# Allegro board reflowSolderCtrl_V10.brd
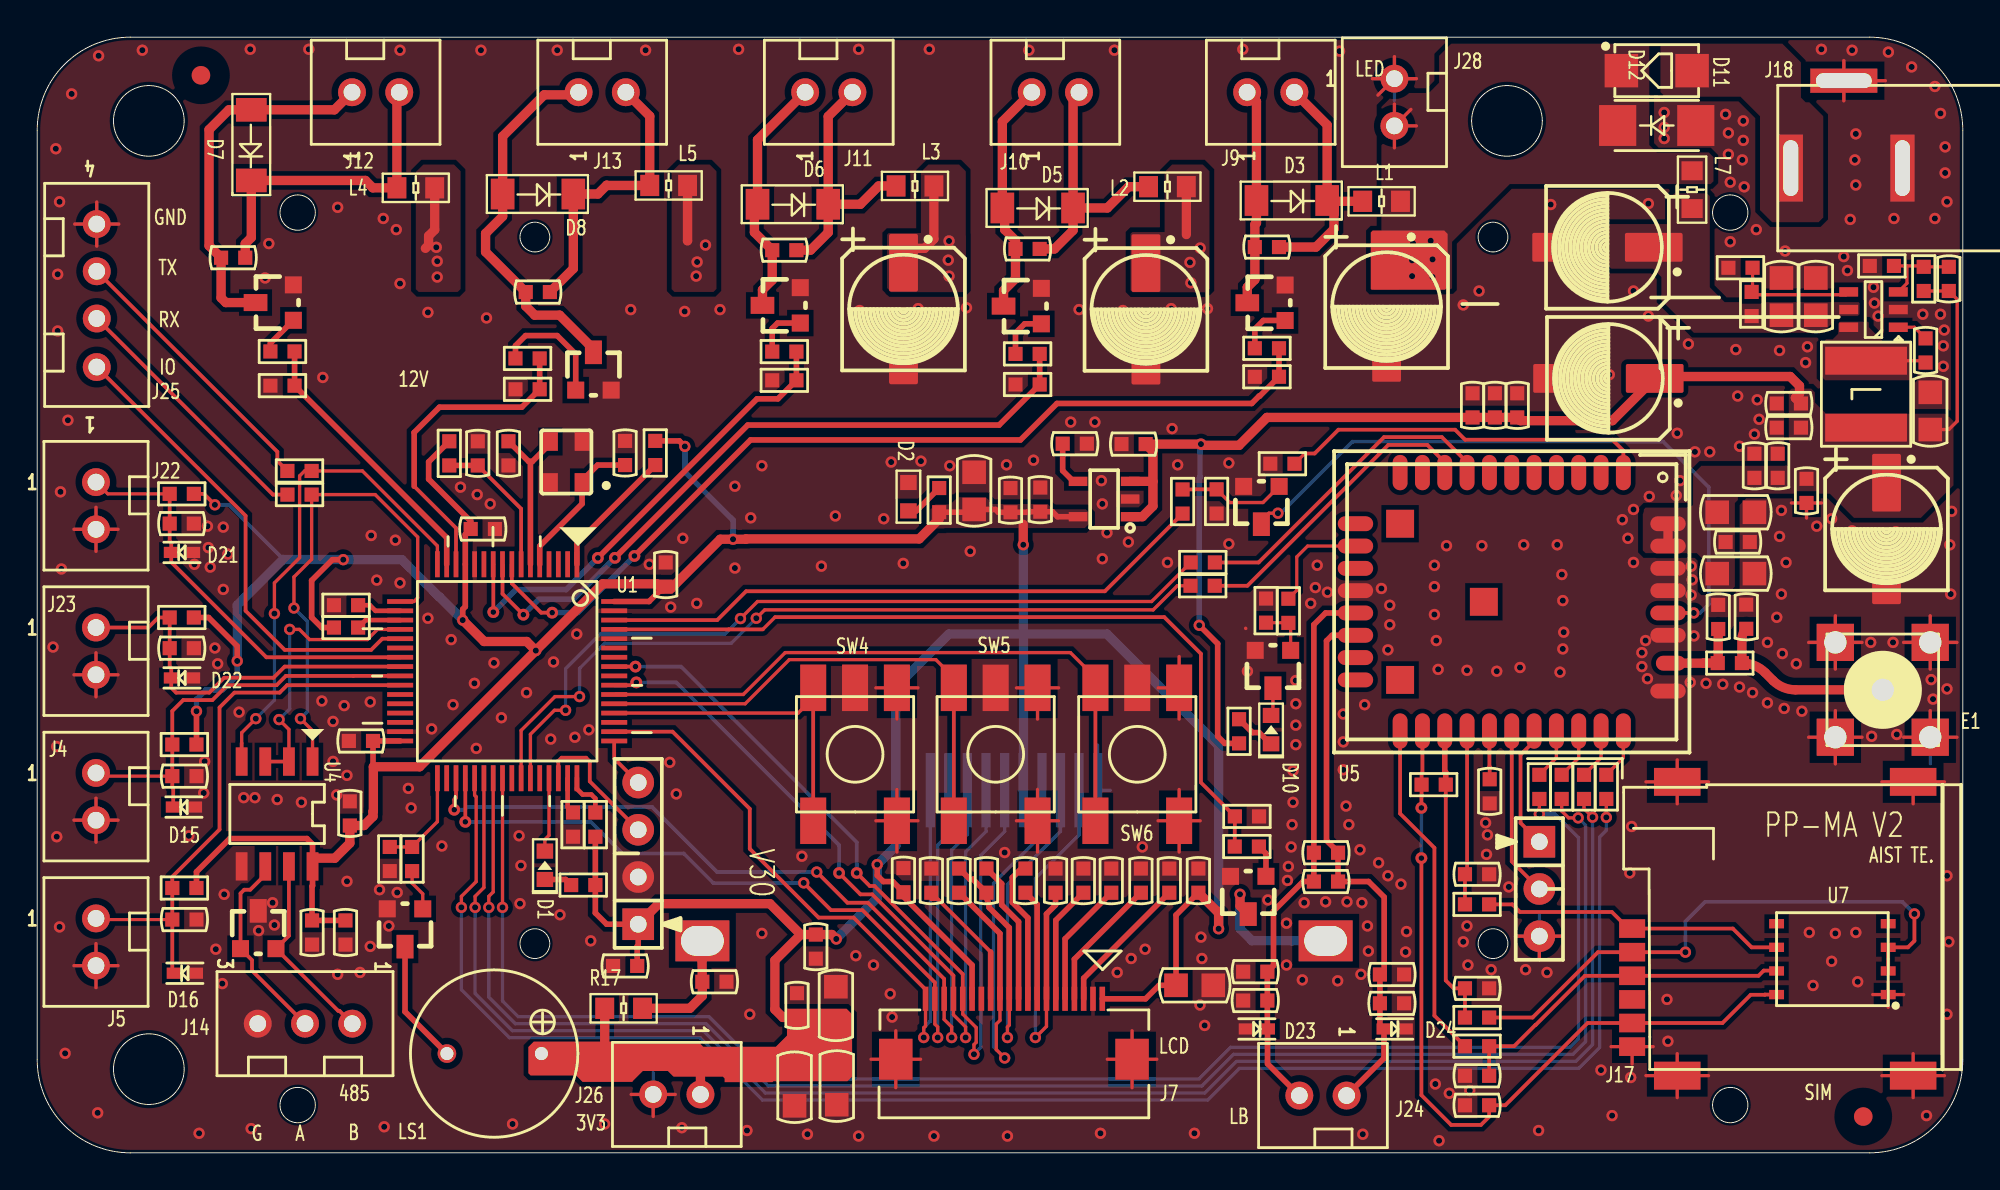
[diagram p0: board, top side]
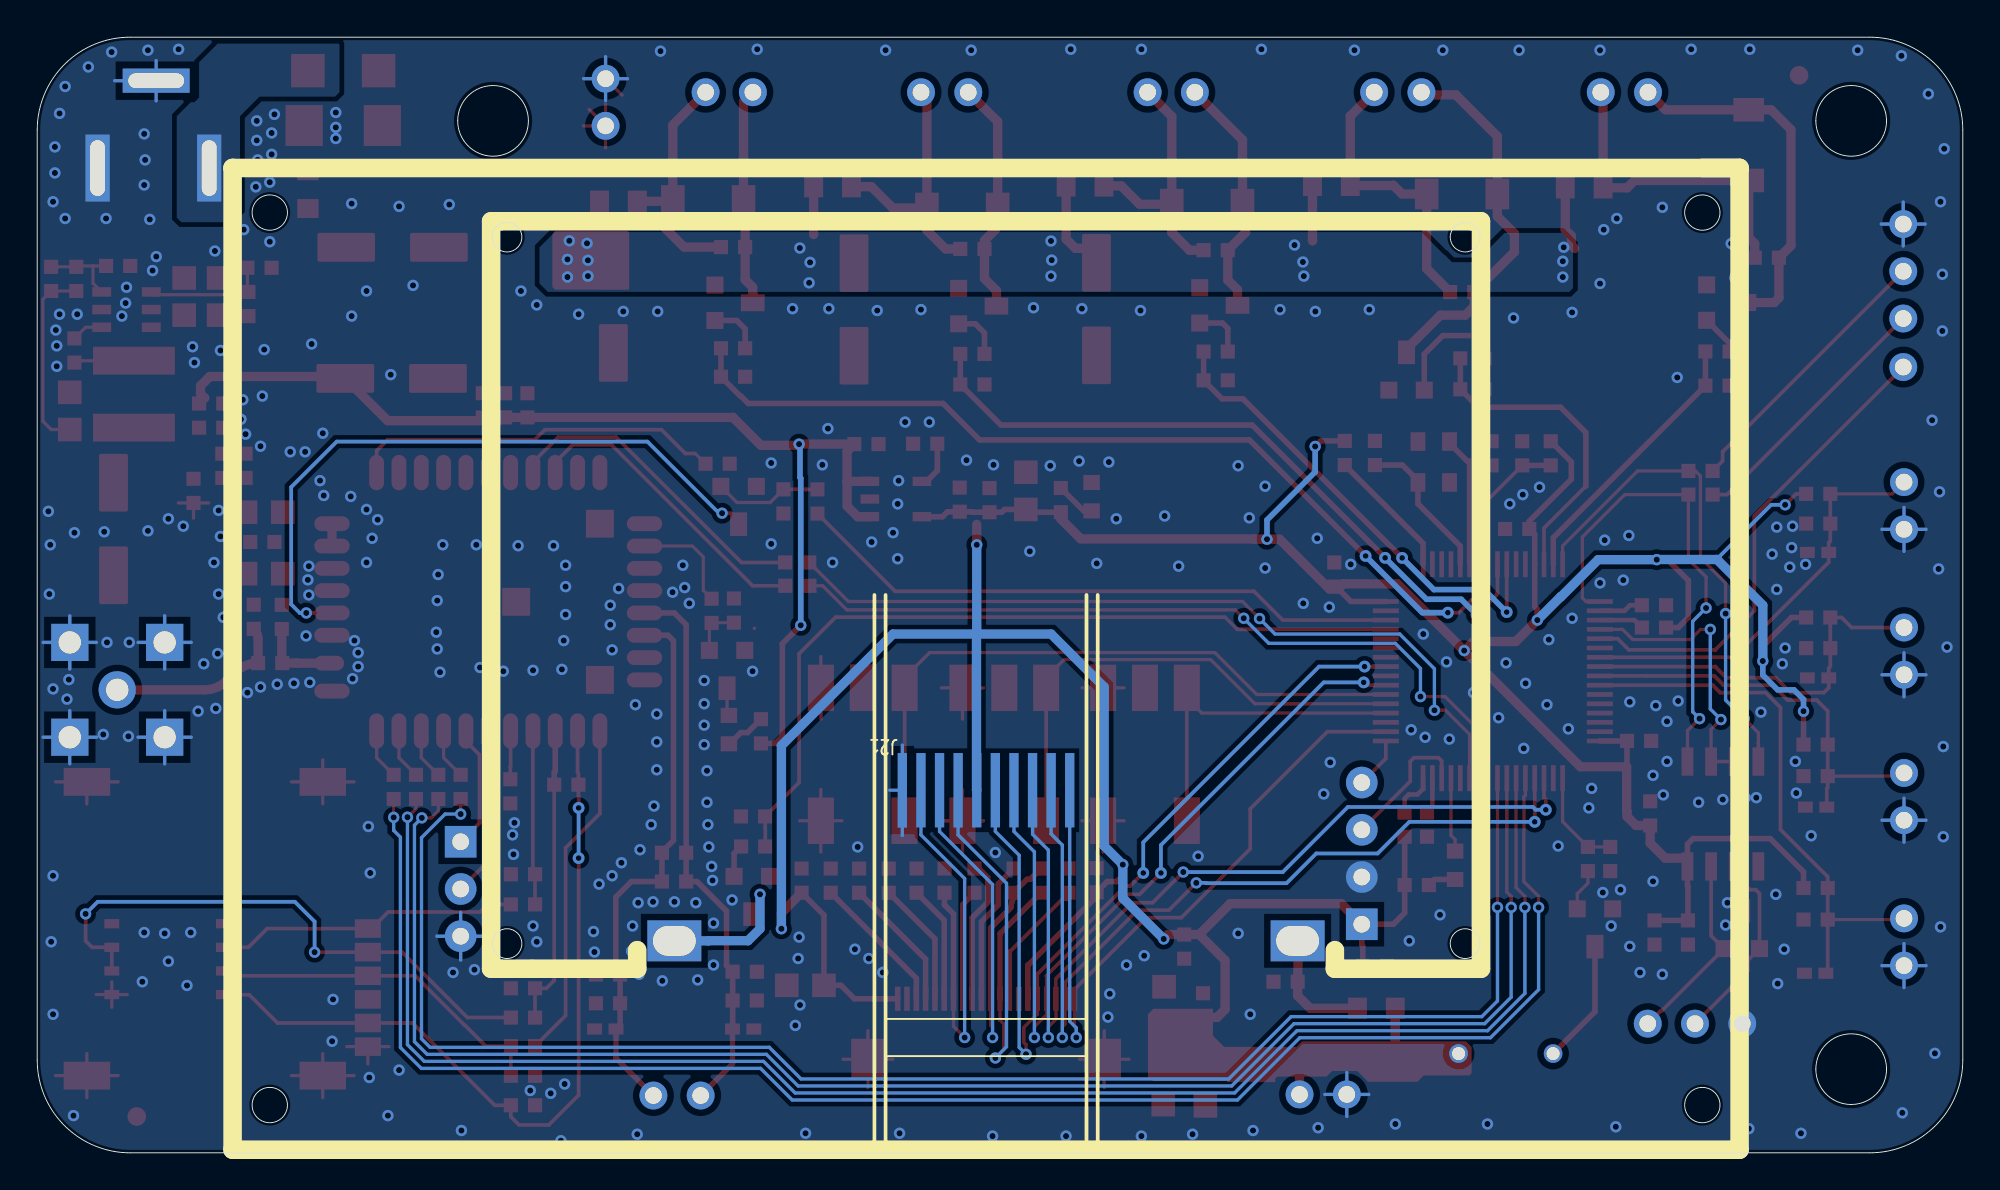
[diagram p1: board, bottom side, seen from below]

Outline 103.5 x 60 mm; copper layers: TOP, BOTTOM. Coordinates in mm from the lower left corner of the outline.
Outline path: circle c14,50.57 r0.95 ; circle c14,2.57 r0.95 ; circle c26.75,49.25 r0.8 ; circle c26.75,11.25 r0.8 ; circle c78.25,49.25 r0.8 ; circle c78.25,11.25 r0.8 ; circle c91,50.57 r0.95 ; circle c91,2.57 r0.95 ; 0,55 arc(1.46,58.54) 5,60 98.5,60 arc(102.04,58.54) 103.5,55 103.5,5 arc(102.04,1.46) 98.5,0 5,0 arc(1.46,1.46) 0,5 0,55 ; 4.1,55.5 arc(6,57.4) 7.9,55.5 arc(6,53.6) 4.1,55.5 ; 4.1,4.5 arc(6,6.4) 7.9,4.5 arc(6,2.6) 4.1,4.5 ; 77.1,55.5 arc(79,57.4) 80.9,55.5 arc(79,53.6) 77.1,55.5

## Placement (name value [footprint] x y rotation side)
C1  10uF/6.3V  [C0603]  33.78 30.45 90 top
C2  1uF/10V  [C0603]  41.85 11.74 270 top
C3  0.1uF/50V  [C0603]  23.3 33.55 0 top
C4  0.1uF/50V  [C0603]  18.05 22.15 180 top
C5  0.1uF/50V  [C0603]  32.25 10.05 180 top
C6  0.1uF/50V  [C0603]  23.68 36.97 90 top
C9  12pF/50V  [C0603]  31.6 38.29 270 top
C10  12pF/50V  [C0603]  25.33 36.97 90 top
C11  1uF/10V  [C0603]  35.75 9.2 0 top
C12  22uF/6.3V  [C0805]  42.98 4.59 270 top
C13  22uF/6.3V  [C0805]  61.21 9.01 0 top
C14  0.1uF/50V  [C0603]  48.06 15.29 270 top
C15  1uF/10V  [C0603]  46.56 14.01 90 top
C16  0.1uF/50V  [C0603]  49.55 15.29 270 top
C17  22uF/6.3V  [C0805]  42.93 6.93 90 top
C18  0.1uF/50V  [C0603]  40.84 7.28 90 top
C19  0.1uF/50V  [C0603]  51.02 13.99 90 top
C20  0.1uF/50V  [C0603]  53.12 15.29 270 top
C21  0.1uF/50V  [C0603]  54.73 15.29 270 top
C22  0.1uF/50V  [C0603]  56.23 15.29 270 top
C23  22uF/6.3V  [C0805]  40.71 4.53 270 top
C24  0.1uF/50V  [C0603]  57.73 15.29 270 top
C25  0.1uF/50V  [C0603]  59.32 15.29 270 top
C26  0.1uF/50V  [C0603]  60.85 15.29 270 top
C27  1uF/10V  [C0603]  62.41 13.99 90 top
C28  220uF/10V  [CAPAE660X540]  72.53 45.51 270 top
C32  0.1uF/50V  [C0603]  66.75 48.71 180 top
C33  10uF/6.3V  [C0603]  59.58 38.12 180 top
C34  10nF/50V  [C0603]  55.12 38.14 0 top
C35  0.1uF/50V  [C0603]  53.92 34.48 90 top
C36  10uF/6.3V  [C0603]  52.31 34.45 90 top
C37  22uF/6.3V  [C0805]  50.36 34.6 90 top
C38  220uF/10V  [CAPAE660X540]  59.59 45.36 270 top
C39  220uF/10V  [CAPAE660X540]  46.56 45.38 270 top
C40  0.1uF/50V  [C0603]  53.88 48.61 180 top
C41  0.1uF/50V  [C0603]  40.81 48.55 180 top
C44  0.1uF/50V  [C0603]  11.18 48.14 180 top
C45  0.1uF/50V  [C0603]  27.56 46.29 180 top
C46  22uF/6.3V  [C0805]  90.3 31.15 0 top
C47  1nF/50V  [C0603]  90.75 32.85 0 top
C48  33pF/50V  [C0603]  92.3 36.3 90 top
C49  10pF/50V  [C0603]  90.35 28.17 90 top
C50  10pF/50V  [C0603]  91.86 28.18 90 top
C51  10uF/6.3V  [C0603]  14.77 12.5 270 top
C52  0.1uF/50V  [C0603]  16.57 12.5 270 top
C53  10nF/50V  [C0603]  16.8 17.6 90 top
C54  2.2uF/6.3V  [C0603]  78.07 20.09 270 top
C55  220uF/10V  [CAPAE660X540]  99.4 33.55 270 top
C56  22uF/6.3V  [C0805]  101.75 38.9 90 top
C57  10uF/6.3V  [C0603]  94.8 40.3 180 top
C58  1uF/10V  [C0603]  78.35 39.55 90 top
C59  0.1uF/50V  [C0603]  79.55 39.55 90 top
C60  1nF/50V  [C0603]  94.8 39 180 top
C61  33pF/50V  [C0603]  77.15 39.55 90 top
C62  220uF/10V  [CAPAE660X540]  84.45 41.65 180 top
C63  0.1uF/50V  [C0603]  101.5 43.8 270 top
C64  22uF/6.3V  [C0805]  90.3 34.45 0 top
C65  10uF/6.3V  [C0603]  93.55 36.3 90 top
C66  0.1uF/50V  [C0603]  95.1 36.25 270 top
C67  22uF/6.3V  [C0805]  93.75 45.05 90 top
C68  22pF/50V  [C0603]  102.75 47.65 270 top
C69  220uF/10V  [CAPAE660X540]  84.4 48.7 180 top
C70  33pF/50V  [C0603]  76.74 8.85 0 top
C71  33pF/50V  [C0603]  76.74 14.98 0 top
C72  33pF/50V  [C0603]  78.04 4.14 180 top
C73  0.1uF/50V  [C0603]  78.04 2.56 180 top
C76  1nF/50V  [C0603]  8.56 20.26 180 top
C77  1nF/50V  [C0603]  8.56 12.54 180 top
C78  1nF/50V  [C0603]  8.42 33.84 180 top
C79  1nF/50V  [C0603]  8.42 27.14 180 top
C80  10pF/50V  [C0603]  69.92 14.59 180 top
C81  10pF/50V  [C0603]  69.92 16.14 180 top
C82  10pF/50V  [C0603]  66.12 8.19 180 top
C83  10pF/50V  [C0603]  66.12 9.74 180 top
C84  10pF/50V  [C0603]  73.47 9.59 180 top
C85  10pF/50V  [C0603]  73.47 8.04 180 top
C86  22uF/6.3V  [C0805]  95.6 45.05 90 top
D1  GreenLed[0603]  [LED0603]  27.29 15.46 90 top
D2  GreenLed[0603]  [LED0603]  46.83 35.29 90 top
D3  1N4148  [SOD123]  69.33 51.22 180 top
D5  1N4148  [SOD123]  55.68 50.82 180 top
D6  1N4148  [SOD123]  42.52 51.02 180 top
D7  1N4148  [SOD123]  11.51 52.3 90 top
D8  1N4148  [SOD123]  28.82 51.57 180 top
D9  SM712.TCT  [SOT23]  11.88 11.97 0 top
D10  GreenLed[0603]  [LED0603]  66.32 22.76 90 top
D11  SS12  [SMA_DO214AC]  87.05 58.2 0 top
D12  SMAJ12CA  [SMAJ]  87.15 55.25 0 top
D15  ESDBL3V3D5  [SOD_523]  8.56 18.59 180 top
D16  ESDBL3V3D5  [SOD_523]  8.61 9.66 180 top
D21  ESDBL3V3D5  [SOD_523]  8.46 32.29 180 top
D22  ESDBL3V3D5  [SOD_523]  8.46 25.54 180 top
D23  ESDBL3V3D5  [SOD_523]  64.88 6.66 0 top
D24  ESDBL3V3D5  [SOD_523]  72.29 6.66 0 top
E1  -  [SMA-90]  102.2 21.9 90 top
FID1  FIDUCAL MARK  [FIDICALMARK]  8.8 57.95 0 top
FID2  FIDUCAL MARK  [FIDICALMARK]  98.15 1.95 0 top
J1  HDR2.54-4P_F  [HDR254M-1X4]  32.3 12.29 90 top
J4  XH2.54-2P  [XH-2]  3.16 19.16 0 top
J5  XH2.54-2P  [XH-2]  3.16 11.34 0 top
J6  CON1  [HOLE_1_6_2_3_OVA_2_2_2_9]  35.75 11.4 0 top
J7  ZIF-0.5-20P  [ZIP_050_20P]  45.49 8.2 0 top
J8  CON1  [HOLE_1_6_2_3_OVA_2_2_2_9]  69.25 11.4 0 top
J9  XH2.54-2P  [XH-2]  66.3 57.04 90 top
J10  XH2.54-2P  [XH-2]  54.73 57.04 90 top
J11  XH2.54-2P  [XH-2]  42.55 57.04 90 top
J12  XH2.54-2P  [XH-2]  18.19 57.04 90 top
J13  XH2.54-2P  [XH-2]  30.37 57.04 90 top
J14  XH2.54-3P  [XH-3]  14.39 6.95 270 top
J15  HDR2.54-3P_F  [HDR254M-1X3]  80.74 16.73 270 top
J17  MICRO_SIM_AUTO_6P  [MICRO_SIM_AUTO_REJECT_6P]  88.15 4.15 90 top
J18  DC-521  [DC35]  107.75 52.96 180 top
J21  CON10  [LX-12864L-1]  52.5 19.3 180 bottom
J22  XH2.54-2P  [XH-2]  3.16 34.8 0 top
J23  XH2.54-2P  [XH-2]  3.16 26.98 0 top
J24  XH2.54-2P  [XH-2]  69.11 3.08 270 top
J25  XH2.54-4P  [XH-4]  3.2 42.26 270 top
J26  XH2.54-2P  [XH-2]  34.38 3.14 270 top
J28  XH2.54-2P  [XH-2]  72.95 56.5 0 top
L1  420R@1A  [R0805]  72.26 51.17 180 top
L2  420R@1A  [R0805]  60.75 51.96 180 top
L3  420R@1A  [R0805]  47.18 52 180 top
L4  420R@1A  [R0805]  20.35 51.9 180 top
L5  420R@1A  [R0805]  33.94 52.03 180 top
L6  2.2uH/3.2A  [L5020]  98.3 40.8 270 top
L7  420R@1A  [R0805]  88.95 51.8 270 top
LS1  Buzzer  [BUZZER_90X55]  24.56 5.34 180 top
Q2  S8050-SOT23  [SOT23]  19.77 12.13 180 top
Q3  S8050-SOT23  [SOT23]  65.09 13.88 180 top
Q4  CJ3402(SOT23)  [SOT23]  66.08 45.72 90 top
Q5  CJ3402(SOT23)  [SOT23]  52.98 45.54 90 top
Q6  CJ3402(SOT23)  [SOT23]  40.02 45.58 90 top
Q7  CJ3402(SOT23)  [SOT23]  12.78 45.73 90 top
Q8  CJ3402(SOT23)  [SOT23]  29.9 42.01 0 top
Q9  S8050-SOT23  [SOT23]  65.8 34.85 180 top
Q10  S8050-SOT23  [SOT23]  66.42 26.03 180 top
R1  1K  [R0603]  33.22 36.99 90 top
R2  10K  [R0603]  22.15 38.27 270 top
R7  1K  [R0603]  28.7 14.4 0 top
R8  1K  [R0603]  48.48 35.75 270 top
R10  51K  [R0603]  8.56 21.96 180 top
R11  51K  [R0603]  8.56 14.24 180 top
R15  1K  [R0603]  20.15 16.45 270 top
R16  51K  [R0603]  18.95 15.15 90 top
R17  120R/1%  [R0805]  31.52 7.77 0 top
R18  1K  [R0603]  64.37 16.47 0 top
R19  51K  [R0603]  65.67 18.09 180 top
R20  1K  [R0603]  66.75 43.27 180 top
R21  51K  [R0603]  65.45 41.74 0 top
R22  1K  [R0603]  53.88 42.97 180 top
R23  1K  [R0603]  40.81 43.09 180 top
R24  51K  [R0603]  52.58 41.32 0 top
R25  51K  [R0603]  39.51 41.55 0 top
R26  1K  [R0603]  13.83 43.1 180 top
R27  51K  [R0603]  12.53 41.26 0 top
R28  1K  [R0603]  27.01 42.72 180 top
R29  51K  [R0603]  25.71 41.06 0 top
R30  0R  [R0603]  90.33 26.34 0 top
R33  1K  [R0603]  64.6 23.32 270 top
R34  5.1K  [R0603]  74.41 19.8 0 top
R35  1K  [R0603]  63.3 31.75 180 top
R36  1K  [R0603]  63.29 30.5 180 top
R37  1K  [R0603]  78.04 5.74 180 top
R39  75K/1%  [R0603]  101.4 47.65 270 top
R40  10K  [R0603]  92.2 47.6 180 top
R41  13K/1%  [R0603]  99.8 47.7 180 top
R42  22R  [R0603]  14.75 36.67 180 top
R43  22R  [R0603]  14.75 35.4 180 top
R44  22R  [R0603]  76.74 13.36 0 top
R45  22R  [R0603]  76.74 7.27 0 top
R47  10K  [R0603]  63.39 35.68 270 top
R48  1K  [R0603]  61.56 35.68 270 top
R49  1K  [R0603]  67.25 28.5 90 top
R50  10K  [R0603]  66.05 28.51 90 top
R51  10K  [R0603]  92.15 46.3 270 top
R52  51K  [R0603]  8.42 35.44 180 top
R53  51K  [R0603]  8.42 28.79 180 top
R54  10K  [R0603]  66.28 37.06 0 top
R55  5.1K  [R0603]  84.34 20.33 270 top
R56  5.1K  [R0603]  83.14 20.33 270 top
R57  5.1K  [R0603]  81.94 20.33 270 top
R58  5.1K  [R0603]  80.74 20.33 270 top
R59  0R  [R0603]  15.95 29.45 0 top
R60  0R  [R0603]  15.95 28.25 0 top
R61  0R  [R0603]  30 18.3 270 top
R62  0R  [R0603]  28.8 18.3 270 top
SW4  SWDT_6X6X3.1_SMT  [TACTILE_6X6X31_SMT]  43.96 21.43 90 top
SW5  SWDT_6X6X3.1_SMT  [TACTILE_6X6X31_SMT]  51.52 21.43 90 top
SW6  SWDT_6X6X3.1_SMT  [TACTILE_6X6X31_SMT]  59.13 21.43 90 top
U1  STM32F103RCT6  [QFP64_20_470]  25.26 25.9 270 top
U2  12MHz  [OSC3225]  28.44 37.15 180 top
U3  SGM2019-3.3YN5G  [SOT23_5]  58.75 34.21 90 top
U4  MAX485EESA  [SOIC8]  12.89 18.22 270 top
U5  -  [AIR202]  79.33 29.63 270 top
U6  SY8113B  [SOT23-6]  98.7 45.35 180 top
U7  E-SIM CHIP-CARD  [QFN5X6-8_ESIM]  96.49 10.42 180 top

## Library data of the parts
C1-C6 C9-C27 C32-C37 C40 C41 C44-C51 C53 C54 C56-C58 C60 C61 C64 C65 C67 C68 C70-C72 C76-C86 = CAP NP: Tolerance: *; User Part Number: *
C28 C38 C39 C55 C62 C69 = CAP: User Part Number: pn; Tolerance: RichardLC
C52 C59 C63 C66 C73 = CAP NP: Tolerance: *; User Part Number: SE02000020
D1 D2 D10 = LED
D3 D5-D8 = DIODE PIN
D9 = ZDC833/SOT
D11 = DIODE
D12 D15 D16 D21-D24 = DIODE TS BI-DIR
E1 = SMA-90
FID1 FID2 = T POINT R_2: Tolerance: *; User Part Number: *
J1 = CON4: User Part Number: pn; Tolerance: RichardLC
J4 J5 J9-J13 J22-J24 J26 J28 = CON2
J6 J8 = CON1
J7 = CON22
J14 = CON3
J15 = CON3: User Part Number: pn; Tolerance: RichardLC
J17 = SIM_AUTO_6P
J18 = DC-011A
J21 = CON10
J25 = CON4
L1-L7 = INDUCTOR
LS1 = SPEAKER
Q2 Q3 Q9 Q10 = NPN
Q4-Q8 = MOSFET-N
R1 R2 R7 R8 R10 R11 R15 R16 R18-R30 R33-R37 R39-R45 R47-R62 = R: Tolerance: *; User Part Number: *
R17 = R
SW4-SW6 = SWDT_SHIELD
U1 = STM32F103RC
U2 = CYSTAL_HIDE2PIN: User Part Number: pn; Tolerance: RichardLC
U3 = PAM3101DBA330: Tolerance: *; User Part Number: *
U4 = MAX485
U5 = Air202
U6 = SY8113B
U7 = E-SIM

## Footprints (pads in the part's own frame, mm; a bottom-side part is the same pattern mirrored in y, then rotated)
AIR202
  rect 1.5x1.5 smd: (-4.2,-6.075) (0,-1.575) (4.2,-6.075)
  oval 1.9x0.8 smd: 1(-6.95,5.925) 2(-6.95,4.725) 3(-6.95,3.525) 4(-6.95,2.325) 5(-6.95,1.125) 6(-6.95,-0.075) 7(-6.95,-1.275) 8(-6.95,-2.475) 9(-6.95,-3.675) 10(-6.95,-4.875) 11(-6.95,-6.075) 20(6.95,-6.075) 21(6.95,-4.875) 22(6.95,-3.675) 23(6.95,-2.475) 24(6.95,-1.275) 25(6.95,-0.075) 26(6.95,1.125) 27(6.95,2.325) 28(6.95,3.525) 29(6.95,4.725) 30(6.95,5.925)
  oval 0.8x1.9 smd: 12(-4.2,-8.475) 13(-3,-8.475) 14(-1.8,-8.475) 15(-0.6,-8.475) 16(0.6,-8.475) 17(1.8,-8.475) 18(3,-8.475) 19(4.2,-8.475) 31(4.8,8.325) 33(1.8,8.325) 34(0.6,8.325) 35(-0.6,8.325) 36(-1.8,8.325) 37(-3,8.325) 38(-4.2,8.325)
  oval 0.8x1.6 smd: 32(3.3,8.475)
BUZZER_90X55
  round 1 hole 0.7: 1(-2.54,0) 2(2.54,0)
C0603
  rect 0.76x0.76 smd: 1(0,0) 2(1.3,0)
C0805
  rect 1.27x1.27 smd: 1(0,0) 2(2,0)
CAPAE660X540
  custom 3.1x1.55 smd: 1(-2.49,0) 2(2.49,0)
DC35
  rect 1.3x3.6 hole 0.8x3: 1(13.5,0) 2(7.5,0)
  rect 3.6x1.3 hole 3x0.8: 3(10.65,-4.7)
FIDICALMARK
  round 1 smd: 1(0,0)
HDR254M-1X3
  rect 1.7x1.7 hole 0.9: 1(0,0)
  round 1.7 hole 0.9: 2(2.54,0) 3(5.08,0)
HDR254M-1X4
  rect 1.7x1.7 hole 0.9: 1(0,0)
  round 1.7 hole 0.9: 2(2.54,0) 3(5.08,0) 4(7.62,0)
HOLE_1_6_2_3_OVA_2_2_2_9
  rect 2.9x2.2 hole 2.3x1.6: 1(0,0)
L5020
  rect 1.5x4.4 smd: 1(-1.8,0) 2(1.8,0)
LED0603
  rect 0.813x0.889 smd: 1(-0.762,0) 2(0.762,0)
LX-12864L-1
  rect 0.5x4 smd: 1(4.5,0.2) 2(3.5,0.2) 3(2.5,0.2) 4(1.5,0.2) 5(0.5,0.2) 6(-0.5,0.2) 7(-1.5,0.2) 8(-2.5,0.2) 9(-3.5,0.2) 10(-4.5,0.2)
MICRO_SIM_AUTO_REJECT_6P
  rect 1.5x2.5 smd: 1(0,0) 2(0,-12.68) 3(15.8,-12.68) 4(15.8,0)
  rect 1x1.4 smd: C1(2.83,2.425) C2(5.37,2.425) C3(7.91,2.425) C5(1.56,2.425) C6(4.1,2.425) C7(6.64,2.425)
OSC3225
  rect 0.8x1 smd: 1(-0.85,1.1) 2(-0.85,-1.1) 3(0.85,-1.1) 4(0.85,1.1)
QFN5X6-8_ESIM
  rect 0.8x0.5 smd: 1(-3,1.905) 2(-3,0.635) 3(-3,-0.635) 4(-3,-1.905) 5(3,-1.905) 6(3,-0.635) 7(3,0.635) 8(3,1.905)
QFP64_20_470
  rect 1.397x0.254 smd: 1(-5.753,3.75) 2(-5.753,3.25) 3(-5.753,2.75) 4(-5.753,2.25) 5(-5.753,1.75) 6(-5.753,1.25) 7(-5.753,0.75) 8(-5.753,0.25) 9(-5.753,-0.25) 10(-5.753,-0.75) 11(-5.753,-1.25) 12(-5.753,-1.75) 13(-5.753,-2.25) 14(-5.753,-2.75) 15(-5.753,-3.25) 16(-5.753,-3.75) 33(5.753,-3.75) 34(5.753,-3.25) 35(5.753,-2.75) 36(5.753,-2.25) 37(5.753,-1.75) 38(5.753,-1.25) 39(5.753,-0.75) 40(5.753,-0.25) 41(5.753,0.25) 42(5.753,0.75) 43(5.753,1.25) 44(5.753,1.75) 45(5.753,2.25) 46(5.753,2.75) 47(5.753,3.25) 48(5.753,3.75)
  rect 0.254x1.397 smd: 17(-3.75,-5.753) 18(-3.25,-5.753) 19(-2.75,-5.753) 20(-2.25,-5.753) 21(-1.75,-5.753) 22(-1.25,-5.753) 23(-0.75,-5.753) 24(-0.25,-5.753) 25(0.25,-5.753) 26(0.75,-5.753) 27(1.25,-5.753) 28(1.75,-5.753) 29(2.25,-5.753) 30(2.75,-5.753) 31(3.25,-5.753) 32(3.75,-5.753) 49(3.75,5.753) 50(3.25,5.753) 51(2.75,5.753) 52(2.25,5.753) 53(1.75,5.753) 54(1.25,5.753) 55(0.75,5.753) 56(0.25,5.753) 57(-0.25,5.753) 58(-0.75,5.753) 59(-1.25,5.753) 60(-1.75,5.753) 61(-2.25,5.753) 62(-2.75,5.753) 63(-3.25,5.753) 64(-3.75,5.753)
R0603
  rect 0.76x0.76 smd: 1(0,0) 2(1.3,0)
R0805
  rect 1.016x1.143 smd: 1(-1.016,0) 2(1.016,0)
SMA-90
  round 2 hole 1.2: 1(3,3)
  rect 2x2 hole 1.2: 2(0.45,5.55) 3(5.55,5.55) 4(5.55,0.45) 5(0.45,0.45)
SMA_DO214AC
  rect 1.8x1.8 smd: 1(-1.9,0) 2(1.9,0)
SMAJ
  rect 2x2.2 smd: 1(2,0) 2(-2.2,0)
SOD123
  rect 1.27x1.651 smd: 1(0,0) 2(3.8,0)
SOD_523
  rect 0.8x0.6 smd: 1(0.1,0) 2(1.25,0)
SOIC8
  rect 1.524x0.635 smd: 1(-2.819,1.905) 2(-2.819,0.635) 3(-2.819,-0.635) 4(-2.819,-1.905) 5(2.819,-1.905) 6(2.819,-0.635) 7(2.819,0.635) 8(2.819,1.905)
SOT23
  rect 0.914x0.914 smd: 1(-0.953,-0.991) 2(0.953,-0.991)
  rect 0.914x1.27 smd: 3(0,1.041)
SOT23-6
  rect 1.016x0.508 smd: 1(-1.333,0.95) 2(-1.333,0) 3(-1.333,-0.95) 4(1.333,-0.95) 5(1.333,0) 6(1.333,0.95)
SOT23_5
  rect 0.5x1.001 smd: 1(0,0) 2(0.95,0) 3(1.9,0) 4(1.9,2.8) 5(0,2.8)
TACTILE_6X6X31_SMT
  rect 2.5x1.4 smd: 1(-3.575,2.25) 2(3.575,2.25) 3(-3.575,-2.25) 4(3.575,-2.25) 5(3.575,0)
XH-2
  round 1.5 hole 0.9: 1(0,1.27) 2(0,-1.27)
XH-3
  round 1.5 hole 0.9: 1(0,2.54) 2(0,0) 3(0,-2.54)
XH-4
  round 1.5 hole 0.9: 1(0,0) 2(-2.61,0) 3(-5.15,0) 4(-7.69,0)
ZIP_050_20P
  rect 0.3x1.3 smd: 1(11.76,0.08) 2(11.26,0.08) 3(10.76,0.08) 4(10.26,0.08) 5(9.76,0.08) 6(9.26,0.08) 7(8.76,0.08) 8(8.26,0.08) 9(7.76,0.08) 10(7.26,0.08) 11(6.76,0.08) 12(6.26,0.08) 13(5.76,0.08) 14(5.26,0.08) 15(4.76,0.08) 16(4.26,0.08) 17(3.76,0.08) 18(3.26,0.08) 19(2.76,0.08) 20(2.26,0.08)
  rect 1.8x2.2 smd: 21(0.66,-3.17) 22(13.36,-3.17)

## Nets
GND: C1.2 C2.2 C3.2 C4.2 C5.2 C6.2 C9.1 C10.1 C11.2 C12.2 C13.2 C14.1 C15.2 C17.2 C18.2 C21.1 C22.1 C23.2 C24.1 C25.1 C26.1 C27.2 C28.2 C33.2 C34.2 C35.2 C36.2 C37.2 C38.2 C39.2 C46.2 C47.2 C48.2 C49.2 C50.2 C51.2 C52.2 C53.2 C54.2 C55.2 C56.2 C57.2 C58.2 C59.2 C60.2 C61.2 C62.2 C64.2 C65.2 C66.2 C67.2 C69.2 C70.2 C71.2 C72.2 C73.2 C76.1 C77.1 C78.1 C79.1 C82.2 C83.2 C84.1 C85.1 C86.2 D2.2(CATHODE) D9.3(A) D12.1 D15.1 D16.1 D21.1 D22.1 D23.1 D24.2 E1.2 E1.3 E1.4 E1.5 J1.2 J4.2 J5.2 J7.2 J7.14 J7.21 J7.22 J14.3 J15.3 J17.1(GND1) J17.2(GND2) J17.3(GND3) J17.4(GND4) J17.C5(GND) J18.2 J18.3 J21.10 J22.2 J23.2 J25.4 J26.2 J28.1 Q2.2(EMITTER) Q3.2(EMITTER) Q4.2(SOURCE) Q5.2(SOURCE) Q6.2(SOURCE) Q7.2(SOURCE) Q8.2(SOURCE) Q9.2(EMITTER) Q10.2(EMITTER) R16.1 R19.1 R21.1 R24.1 R25.1 R27.1 R29.1 R40.2 R41.2 R47.2 R50.2 R54.1 R59.1 R62.2 SW4.3 SW4.4 SW4.5 SW5.3 SW5.4 SW5.5 SW6.3 SW6.4 SW6.5 U1.12(VSSA) U1.31(VSS1) U1.60(BOOT0) U1.63(VSS3) U2.2 U2.4 U3.2(GND) U4.5(GND) U5.15(GND#15) U5.31(GND#31) U5.33(GND#33) U5.35(GND#35) U5.36(GND#36) U6.2(GND) U7.1(VSS)
VCC2V8-EXT: C54.1 U5.24(VDDIO)
VCC-M2M: C33.1 C46.1 C47.1 C48.1 C55.1 C56.1 C57.1 C58.1 C59.1 C60.1 C61.1 C62.1 C64.1 C65.1 C66.1 C68.2 L6.2 R33.2 R39.2 U3.1(VIN) U3.3(EN) U5.37(VBAT#37) U5.38(VBAT#38)
VCC-SIM: C73.1 J17.C1(VCC) R34.1 U5.21(SIM_VDD) U7.8(VDD)
VCC_3V3: C1.1 C2.1 C3.1 C4.1 C5.1 C12.1 C13.1 C15.1 C17.1 C18.1 C23.1 C27.1 C35.1 C36.1 C37.1 C51.1 C52.1 C53.1 J1.1 J7.1 J7.15 J21.6 J26.1 LS1.1 R1.2 R2.1 R7.2 R8.2 R10.1 R11.1 R17.1 R52.1 R53.1 R60.1 R61.2 U1.13(VDDA) U1.32(VDD1) U1.64(VDD3) U3.5(VOUT) U4.8(VCC)
VCC_12V: C28.1 C38.1 C39.1 D11.1(K) D12.2 J28.2 L1.1 L2.1 L3.1 L4.1 L5.1 L7.1
ARM_SWCLK: J1.4 U1.49(PA14/JTCK_SWCLK)
ARM_SWDIO: J1.3 U1.46(PA13/JTMS_SWDIO)
BK_A: C11.1 J6.1 R17.2
BK_K: J8.1 Q3.3(COLLECTOR)
BUZZER: R15.1 R16.2 U1.33(PB12/SPI2_NSS/I2S2_WS/I2C2_SMBA)
CLOSER_DEACT: J25.1 U1.21(PA5/SPI1_SCK/DAC_OUT2/ADC12_IN5)
CON1: R58.2 U1.40(PC9/TIM8_CH4/SDIO_D1)
CON2: R57.2 U1.39(PC8/TIM8_CH3/SDIO_D0)
CON3: R56.2 U1.38(PC7/I2S3_MCK/TIM8_CH2/SDIO_D7)
CON4: R55.2 U1.37(PC6/I2S2_MCK/TIM8_CH1/SDIO_D6)
CPU_STATUS: D1.2(CATHODE) U1.45(PA12/USART1_RTS/USBDP/CAN_TX/TI)
HOST_RXD: J15.2 U5.25(HOST_RXD)
HOST_TXD: J15.1 U5.26(HOST_TXD)
KEY1: SW4.1 SW4.2 U1.52(PC11/UART4_RX/SDIO_D3)
KEY2: SW5.1 SW5.2 U1.53(PC12/UART5_TX/SDIO_CK)
KEY3: SW6.1 SW6.2 U1.54(PD2/TIM3_ETR/UART5_RX/SDIO_CMD)
LCD_A0: J7.18 J21.3 U1.35(PB14/SPI2_MISO/TIM1_CH2N/USART3)
LCD_BKLIGHT: R18.1 R19.2 U1.61(PB8/TIM4_CH3/SDIO_D4)
LCD_NCS: J7.20 J21.1 U1.50(PA15/JTDI/SPI3_NSS/I2S3_WS)
LCD_NRST: J7.19 J21.2 U1.36(PB15/SPI2_MOSI/I2S2_SD/TIM1_CH3)
LCD_SCK: J7.17 J21.4 U1.55(PB3/JTDO/SPI3_SCK/I2S3_CK)
LCD_SDI: J7.16 J21.5 U1.57(PB5/I2C1_SMBA/SPI3_MOSI/I2S3_SD)
LED_LINE: R20.1 R21.2 U1.8(PC0_ADC123_IN10)
M2M_NLED: R49.2 U5.13(32K_OUT/GPIO_33)
M2M_NRST: Q9.3(COLLECTOR) U5.34(RESET)
M2M_PWRKEY: R48.2 U1.62(PB9/TIM4_CH4/SDIO_D5)
M2M_RXD: R36.1 U5.9(UART1_RXD/GPIO_0)
M2M_TXD: R35.1 U5.8(UART1_TXD/GPIO_1)
MOTOR_CTRL1: R22.1 R24.2 U1.9(PC1/ADC123_IN11)
MOTOR_CTRL2: R23.1 R25.2 U1.10(PC2/ADC123_IN12)
MOTOR_CTRL3: R28.1 R29.2 U1.14(PA0/WKUP/USART2_CTS/ADC123_IN0/)
MOTOR_CTRL4: R26.1 R27.2 U1.15(PA1/USART2_RTS/ADC123_IN1/TIM5_)
PA9(M2M_RX): R36.2 U1.42(PA9/USART1_TX/TIM1_CH2)
PA10(M2M_TX): R35.2 U1.43(PA10/USART1_RX/TIM1_CH3)
RS485_DIR: U1.20(PA4/SPI1_NSS/USART2_CK/DAC_OUT1) U4.2(\\R\E) U4.3(DE)
RS485_RX: R43.1 U1.17(PA3/USART2_RX/TIM5_CH4/ADC123_I) U4.1(RO)
RS485_TX: R42.1 U1.16(PA2/USART2_TX/TIM5_CH3/ADC123_I) U4.4(DI)
SPK_N: C80.1 C81.1 C84.2 C85.2 D24.1 J24.1 U5.17(SPKN)
SPK_P: C80.2 C81.2 C82.1 C83.1 D23.2 J24.2 U5.16(SPKP)
SWITCH1: C78.2 D21.2 J22.1 R52.2 U1.23(PA7/SPI1_MOSI/TIM8_CH1N/ADC12_I)
SWITCH2: C79.2 D22.2 J23.1 R53.2 U1.24(PC4/ADC12_IN14)
SWITCH3: C76.2 D15.2 J4.1 R10.2 U1.25(PC5/ADC12_IN15)
SWITCH4: C77.2 D16.2 J5.1 R11.2 U1.26(PB0/ADC12_IN8/TIM3_CH3/TIM8_CH2)
UIM_CLK: C71.1 R44.1 U5.23(SIM_CLK)
UIM_DAT: C70.1 R34.2 R45.1 U5.22(SIM_DAT)
UIM_RST: C72.1 J17.C2(RST) R37.1 U7.7(RST)
N1759652: C63.1 U6.1(BS)
N1759680: C63.2 L6.1 U6.6(LX)
N1759848: C68.1 R39.1 R41.1 U6.3(FB)
N1765454: C67.1 C69.1 C86.1 L7.2 R51.2 U6.5(IN)
N2040598: J17.C3(CLK) R44.2 U7.6(CLK)
N2040809: J17.C7(DAT) R45.2 U7.2(I/O0) U7.3(I/O1)
N16946466: C6.1 R2.2 U1.7(NRST)
N16946476: C10.2 U1.6(OSC_OUT) U2.3
N16946478: C9.2 U1.5(OSC_IN) U2.1
N16953286: LS1.2 Q2.3(COLLECTOR)
N16955118: R1.1 U1.1(VBAT)
N17004384: C34.1 U3.4(BYP)
N17045369: Q3.1(BASE) R18.2
N17083363: Q2.1(BASE) R15.2
N17090159: C49.1 R30.1 U5.32(ANT)
N17090163: C50.1 E1.1 R30.2
N17091772: R37.2 U5.20(SIM_RST)
N17104658: D9.2(C2) J14.1 U4.7(B)
N17104686: D9.1(C1) J14.2 U4.6(A)
N17118623: C40.1 D5.1(K) J10.2 L2.2
N17118627: C40.2 D5.2(A) J10.1 Q5.3(DRAIN)
N17128567: Q5.1(GATE) R22.2
N17129471: C41.2 D6.2(A) J11.1 Q6.3(DRAIN)
N17129483: C41.1 D6.1(K) J11.2 L3.2
N17129487: Q6.1(GATE) R23.2
N17129769: C44.2 D7.2(A) J12.1 Q7.3(DRAIN)
N17129781: C44.1 D7.1(K) J12.2 L4.2
N17129785: Q7.1(GATE) R26.2
N17130076: C45.2 D8.2(A) J13.1 Q8.3(DRAIN)
N17130088: C45.1 D8.1(K) J13.2 L5.2
N17130092: Q8.1(GATE) R28.2
N17130929: C32.2 D3.2(A) J9.1 Q4.3(DRAIN)
N17130933: C32.1 D3.1(K) J9.2 L1.2
N17130937: Q4.1(GATE) R20.2
N17139677: R40.1 R51.1 U6.4(EN)
N17146852: C14.2 J7.13
N17147425: C16.2 J7.12 J21.7
N17147428: C16.1 C19.1 J7.11 J21.8
N17147560: C19.2 J7.10
N17147576: C20.2 J7.8
N17147579: C20.1 J7.9
N17147653: C21.2 J7.7 J21.9
N17147656: C22.2 J7.6
N17147659: C24.2 J7.5
N17147662: C25.2 J7.4
N17147665: C26.2 J7.3
N17170357: Q9.1(BASE) R47.1 R48.1
N17173564: Q10.1(BASE) R49.1 R50.1
N17174278: D10.1(ANODE) R33.1
N17185054: D11.2(A) J18.1
N17197797: R54.2 U5.1(PWRKEY)
N17203118: R55.1 U5.30(UART2_CTS/GPIO_7)
N17203121: R56.1 U5.29(UART2_RTS/GPIO_6)
N17203124: R57.1 U5.28(UART2_TXD/GPIO_5)
N17203355: R58.1 U5.27(UART2_RXD/GPIO_4)
N17205657: J25.2 R43.2
N17205689: J25.3 R42.2
N17208386: R59.2 U1.18(VSS4)
N17208667: R60.2 U1.19(VDD4)
N17209260: R61.1 U1.48(VDD2)
N17209595: R62.1 U1.47(VSS2)
N169967930: D2.1(ANODE) R8.1
N169968320: D1.1(ANODE) R7.1
N170492131: D10.2(CATHODE) Q10.3(COLLECTOR)

Pads without a net: FID1 1; FID2 1; J17 C6; U1 2 3 4 11 22 27 28 29 30 34 41 44 51 56 58 59; U5 2 3 4 5 6 7 10 11 12 14 18 19; U7 4 5

## Via types
v1: diameter 0.61, hole 0.33, TOP to BOTTOM, 443 vias
v2: diameter 0.635, hole 0.305, TOP to BOTTOM, 14 vias

## Routing (per net, layer and track width the routed paths; a pad name or vN(x,y) marks a point on that pad's centre or on a via; arc(x,y) is an arc through that point)
GND: length 203.9
  TOP w0.178: 97.11,56.58 J18.3 ; J18.3 99.34,57.66 ; J18.3 97.11,58.74 ; 3.16,8.88 J5.2 ; J5.2 4.34,10.07 ; J5.2 1.98,10.07 ; J5.2 3.16,11.25 ; 99.49,7.83 U7.1 ; U7.1 98.66,8.51 ; U7.1 99.49,9.19 ; U7.1 100.32,8.51 ; 99.15,19.95 J17.3 ; J17.3 100.83,18.77 ; J17.3 102.51,19.95 ; E1.2 96.65,23.78 ; E1.2 95.22,22.35 ; E1.2 96.65,20.92 ; E1.2 98.08,22.35 ; 79.46,11.65 J15.3 ; J15.3 82.02,11.65 ; J15.3 80.74,10.37 ; 100.32,27.45 E1.4 ; E1.4 103.18,27.45 ; E1.4 101.75,28.88 ; E1.4 101.75,26.02 ; 46.21,16.18 SW4.3 ; SW4.3 45.08,17.86 ; SW4.3 47.34,17.86 ; SW4.3 46.21,19.54 ; J17.1 89.83,4.15 ; J17.1 88.15,5.33 ; J17.1 88.15,2.97 ; J17.1 86.47,4.15 ; 3.16,32.35 J22.2 ; J22.2 1.98,33.53 ; J22.2 4.34,33.53 ; J22.2 3.16,34.71 ; 58.85,3.5 J7.22 ; J7.22 58.85,6.57 ; J7.22 57.52,5.03 ; J7.22 60.18,5.03 ; J17.4 89.83,19.95 ; J17.4 86.47,19.95 ; J17.4 88.15,18.77 ; J17.4 88.15,21.13 ; SW6.3 61.38,19.54 ; SW6.3 60.25,17.86 ; SW6.3 62.51,17.86 ; SW6.3 61.38,16.18 ; 1.98,25.71 J23.2 ; J23.2 4.34,25.71 ; J23.2 3.16,24.53 ; J23.2 3.16,26.89 ; J7.21 46.15,6.57 ; J7.21 46.15,3.5 ; J7.21 44.82,5.03 ; J7.21 47.48,5.03 ; 64.95,28.21 64.96,28.2 ; C66.2 95.91,34.95 ; C66.2 94.29,34.95 ; C66.2 95.1,34.14 ; J4.2 3.16,19.07 ; J4.2 3.16,16.71 ; J4.2 4.34,17.89 ; J4.2 1.98,17.89 ; 95.22,27.45 E1.3 ; E1.3 98.08,27.45 ; E1.3 96.65,26.02 ; E1.3 96.65,28.88 ; J28.1 74.13,57.77 ; J28.1 72.95,58.95 ; J28.1 72.06,56.88 ; J28.1 71.77,57.77 ; J25.4 3.2,51.13 ; J25.4 4.38,49.95 ; J25.4 2.02,49.95 ; J25.4 3.2,48.77 ; SW5.4 54.9,25.01 ; SW5.4 52.64,25.01 ; SW5.4 53.77,23.33 ; 61.38,23.33 SW6.4 ; SW6.4 60.25,25.01 ; SW6.4 61.38,26.69 ; 100.83,2.97 J17.2 ; J17.2 102.51,4.15 ; J17.2 99.15,4.15 ; J17.2 100.83,5.33 ; SW5.3 54.9,17.86 ; SW5.3 53.77,16.18 ; SW5.3 53.77,19.54 ; SW5.3 52.64,17.86 ; 33.11,1.96 J26.2 ; J26.2 34.29,3.14 ; J26.2 31.93,3.14 ; 46.21,23.33 SW4.4 ; SW4.4 45.08,25.01 ; SW4.4 47.34,25.01 ; E1.5 103.18,22.35 ; E1.5 101.75,23.78 ; E1.5 100.32,22.35 ; J17.C5 86.86,5.71 ; J17.C5 85.73,4.78 ; J17.C5 84.59,5.71
  BOTTOM w0.178: 101.75,20.92 E1.5 ; E1.5 103.18,22.35 ; E1.5 101.75,23.78 ; E1.5 100.32,22.35 ; E1.3 98.08,27.45 ; E1.3 95.22,27.45 ; E1.3 96.65,26.02 ; E1.3 96.65,28.88 ; E1.2 96.65,23.78 ; E1.2 96.65,20.92 ; E1.2 95.22,22.35 ; E1.2 98.08,22.35 ; 100.32,27.45 E1.4 ; E1.4 101.75,26.02 ; E1.4 101.75,28.88 ; E1.4 103.18,27.45 ; 79.46,11.65 J15.3 ; J15.3 80.74,10.37 ; J15.3 82.02,11.65 ; J15.3 80.74,12.93 ; J4.2 3.16,19.07 ; J4.2 1.98,17.89 ; J4.2 3.16,16.71 ; J4.2 4.34,17.89 ; 31.93,3.14 J26.2 ; J26.2 33.11,1.96 ; J26.2 33.11,4.32 ; J26.2 34.29,3.14 ; 3.16,32.35 J22.2 ; J22.2 3.16,34.71 ; J22.2 4.34,33.53 ; J22.2 1.98,33.53 ; 3.2,48.77 J25.4 ; J25.4 4.38,49.95 ; J25.4 3.2,51.13 ; J25.4 2.02,49.95 ; J28.1 74.13,57.77 ; J28.1 72.95,58.95 ; J28.1 72.95,56.59 ; J28.1 71.77,57.77 ; J23.2 3.16,26.89 ; J23.2 1.98,25.71 ; J23.2 3.16,24.53 ; J23.2 4.34,25.71 ; J5.2 3.16,11.25 ; J5.2 4.34,10.07 ; J5.2 3.16,8.88 ; J5.2 1.98,10.07 ; J18.3 97.11,58.74 ; J18.3 99.34,57.66 ; J18.3 97.11,56.58 ; J21.10 57.68,19.5 ; J21.10 57,17.07 ; J21.10 57,21.93
  vias: v1(0.85,27.2) v1(1,54) v1(1.1,47.25) v1(1.1,44.2) v1(1.05,21.85) v1(1.05,17) v1(1.2,51.15) v1(1.25,35.55) v1(1.2,12.15) v1(1.3,31.4) v1(1.5,5.35) v1(1.65,39.4) v1(1.85,56.95) v1(3.25,2.15) v1(3.3,59) v1(5.65,59.3) v1(8.15,17.05) v1(8.45,31.65) v1(8.7,1.05) v1(8.95,19.35) v1(9,21.05) v1(9.15,33.7) v1(9.2,32.55) v1(9.3,31.5) v1(9.55,27.15) v1(9.6,10.95) v1(9.7,26.3) v1(9.95,9.1) v1(10,33.65) v1(10,30.3) v1(10.05,13.9) v1(10.25,32.2) v1(10.85,23.7) v1(11.1,19.1) v1(11.45,59.35) v1(11.5,1.3) v1(11.7,19.1) v1(11.9,11.95) v1(12.25,47.05) v1(12.45,48.9) v1(12.65,13.45) v1(12.75,12.25) v1(12.9,19) v1(14.2,18.85) v1(14.6,59.35) v1(15.35,41.7) v1(15.3,24.3) v1(15.9,23.2) v1(15.9,21.05) v1(16.15,50.85) v1(16.1,19.25) v1(16.15,9.6) v1(16.5,24.05) v1(16.65,20.3) v1(16.65,14.6) v1(17.35,9.7) v1(17.95,33.2) v1(17.9,24.25) v1(17.9,11.1) v1(18.25,30.8) v1(18.4,14.15) v1(18.6,50.25) v1(18.65,1.4) v1(18.9,12.2) v1(19.25,32.95) v1(19.3,49.65) v1(19.35,14) v1(19.5,59.3) v1(19.5,46.75) v1(19.5,30.65) v1(19.95,19.6) v1(20.1,18.55) v1(21,45.2) v1(21,28.75) v1(21.2,22.8) v1(21.75,16.5) v1(22.25,27.6) v1(22.35,24.1) v1(22.75,35.8) v1(23.5,25.25) v1(23.65,35.4) v1(23.6,21.75) v1(23.85,59.3) v1(24.15,44.9) v1(24.35,34.9) v1(24.55,26.35) v1(24.95,23.4) v1(25.55,1.55) v1(25.9,17.05) v1(25.95,13.4) v1(26,15.45) v1(26.3,24.75) v1(27.6,22.25) v1(27.75,26.4) v1(27.95,59.3) v1(28.1,12.8) v1(28.9,22.35) v1(29,27.9) v1(29.65,22.75) v1(29.75,11.4) v1(30.5,1.55) v1(31.9,45.35) v1(32.7,59.3) v1(32.9,31.65) v1(34.05,29.35) v1(34,21) v1(34.35,19.3) v1(34.65,1.35) v1(34.7,33.05) v1(34.8,45.25) v1(35.45,29.55) v1(36.7,45.35) v1(37.5,35.85) v1(37.5,31.45) v1(37.7,59.35) v1(38.15,1.2) v1(38.3,7.45) v1(38.35,34.15) v1(38.95,36.95) v1(38.95,11.8) v1(41.1,15.95) v1(41.4,1) v1(42.15,31.55) v1(42.9,34.25) v1(44,10.6) v1(44.15,59.35) v1(44.15,0.9) v1(44.2,45.3) v1(44.95,10.1) v1(45.5,34.1) v1(45.9,37.15) v1(45.85,8.55) v1(45.95,7.3) v1(46.55,31.7) v1(47.35,45.4) v1(47.5,37.2) v1(47.95,59.35) v1(48.2,0.9) v1(49.05,36.95) v1(49.95,45.45) v1(50.15,32.35) v1(52,16.15) v1(52.1,37) v1(52.15,0.9) v1(53.3,59.3) v1(53.55,37.25) v1(55.55,39.3) v1(56,45.35) v1(56.85,39.3) v1(57.15,1.05) v1(57.2,36.15) v1(57.25,34.9) v1(57.25,31.95) v1(57.5,33.35) v1(57.9,59.3) v1(58.05,9.7) v1(58.35,45.3) v1(58.65,32.85) v1(58.8,10.45) v1(59.4,16.45) v1(59.55,10.95) v1(60.75,31.75) v1(60.95,45.4) v1(61,38.95) v1(61.3,37) v1(62.2,1.05) v1(62.55,11.6) v1(62.5,7.95) v1(62.6,10.45) v1(62.75,6.85) v1(62.9,45.4) v1(64.05,37.1) v1(64.05,32.75) v1(64.8,59.35) v1(65.05,25.9) v1(66.15,13.6) v1(67.25,15.4) v1(67.2,14.65) v1(67.15,12.35) v1(67.15,10.1) v1(67.4,16.45) v1(67.5,20.55) v1(67.5,18.85) v1(67.45,17.65) v1(67.65,25.4) v1(67.65,24.15) v1(67.65,23) v1(67.65,21.95) v1(68,9.3) v1(68.1,13.45) v1(68.45,29.55) v1(68.7,30.4) v1(68.8,31.6) v1(69.25,13.5) v1(69.35,30.15) v1(69.9,9.25) v1(70,59.25) v1(70.15,45.25) v1(70.2,23.6) v1(70.2,22.1) v1(70.2,20.6) v1(70.35,18.65) v1(70.4,13.5) v1(70.5,17.65) v1(71.1,16.3) v1(71.2,13.45) v1(71.15,9.6) v1(71.25,1) v1(71.35,24.1) v1(71.5,12.2) v1(71.55,10.85) v1(72,45.25) v1(72.1,15.6) v1(72.25,30.35) v1(72.6,27.05) v1(72.6,14.9) v1(72.7,29.45) v1(72.7,28.4) v1(73.3,14.45) v1(73.55,10.8) v1(73.6,11.9) v1(74.4,45.1) v1(75.1,31.6) v1(75.1,30.45) v1(75.1,28.95) v1(75.2,27.55) v1(75.15,3.7) v1(75.3,26) v1(75.35,0.65) v1(75.75,32.65) v1(75.9,3.2) v1(76.65,45.6) v1(76.65,11.35) v1(76.85,25.95) v1(76.85,12.2) v1(76.9,10.1) v1(77,3.35) v1(77.5,46.35) v1(77.65,32.65) v1(77.85,17.75) v1(77.9,16.05) v1(77.95,17.1) v1(78.15,9.85) v1(78.45,25.9) v1(79.1,14.3) v1(79.7,26.1) v1(79.9,32.7) v1(80,9.85) v1(80.7,1.2) v1(81.15,9.7) v1(81.35,51) v1(81.7,32.7) v1(81.85,25.85) v1(81.95,31.1) v1(82,29.7) v1(82.05,28) v1(82,27.1) v1(83.3,46.65) v1(84.05,50.9) v1(84.05,4.45) v1(84.5,41.85) v1(84.65,2) v1(85.2,34.05) v1(85.5,33.05) v1(85.6,15.05) v1(85.7,17.55) v1(85.65,4.05) v1(85.8,46.35) v1(85.8,34.6) v1(85.8,31.75) v1(86.25,26.9) v1(86.25,26.15) v1(86.45,27.55) v1(86.55,25.5) v1(86.6,51.05) v1(86.6,45) v1(86.65,35.3) v1(87.45,55.95) v1(87.45,55.15) v1(87.45,54.55) v1(87.6,8.25) v1(87.65,6) v1(88.1,35.35) v1(88.15,38.7) v1(88.3,36.15) v1(88.75,43.5) v1(88.85,25.3) v1(88.9,31.55) v1(88.9,30) v1(88.95,30.82) v1(89.05,27.8) v1(89.1,37.7) v1(89.7,25.25) v1(89.9,37.7) v1(90.6,25.2) v1(90.75,55.85) v1(90.9,54.85) v1(90.9,53.7) v1(91,52.2) v1(91,49) v1(91.3,43.2) v1(91.4,40.7) v1(91.5,38) v1(91.5,25.05) v1(91.7,55.5) v1(91.7,54.45) v1(91.65,53.4) v1(91.75,51.95) v1(92.2,24.75) v1(92.3,38.65) v1(92.4,49.65) v1(92.45,40.5) v1(92.55,39.45) v1(93,27.45) v1(93,24.2) v1(93.5,28.8) v1(93.65,43.15) v1(93.65,33.15) v1(93.75,34.55) v1(93.75,30.05) v1(93.8,26.85) v1(93.9,23.9) v1(93.95,48.5) v1(94,31.75) v1(94.55,26.3) v1(94.85,23.75) v1(95.05,42.5) v1(95.15,43.35) v1(95.25,11.85) v1(95.45,9) v1(95.65,33.7) v1(95.9,59.35) v1(96.45,34.1) v1(96.45,10.3) v1(96.65,11.8) v1(97.1,48.2) v1(97.3,47.45) v1(97.55,59.3) v1(97.45,50.2) v1(97.55,33.45) v1(97.7,53.4) v1(97.75,54.8) v1(97.75,52.05) v1(97.75,11.85) v1(97.85,9.2) v1(98.55,27.45) v1(98.6,22.4) v1(98.7,46.55) v1(98.75,45.7) v1(98.95,45) v1(99.5,59.2) v1(99.8,50.25) v1(99.75,27.45) v1(99.9,33.4) v1(99.95,22.5) v1(100.75,58.4) v1(101.35,45.1) v1(101.5,33.35) v1(101.55,2) v1(101.8,25.45) v1(101.9,24.4) v1(102,57.35) v1(102,50.25) v1(102.3,55.9) v1(102.3,45.1) v1(102.55,54.1) v1(102.55,52.7) v1(102.5,44.25) v1(102.45,43.4) v1(102.45,42.3) v1(102.65,51.15) v1(102.65,24.95) v1(102.65,14.9) v1(102.65,7.45) v1(102.8,32.7) v1(102.85,30.05) v1(102.75,11.35) v1(102.9,34.5)
VCC2V8-EXT: length 2.6
  TOP w0.2: C54.1 78.07,20.77 78.06,20.78 U5.24
VCC-M2M: length 73.3
  TOP w0.17: R39.2 C68.2 ; 102.1,38.9 C56.1
  TOP w0.178: C68.2 103.2,45.9 103.2,39.35 102.75,38.9 102.1,38.9
  TOP w0.3: R33.2 63.83,22.02 63.45,22.4 63.45,27.38 v1(62.46,28.37)
  TOP w0.5: U5.38 U5.37 ; U3.1 59.4,34.21 59.97,34.78 59.97,36.1 ; 59.97,36.1 59.96,36.11 U3.3 ; 59.97,36.1 59.97,37.73 C33.1 v1(62.55,38.12) 62.62,38.05 64.6,38.05 66.1,39.55 C61.1 C58.1 C59.1 79.72,39.38 84.67,39.38 C62.1 87.04,41.75 94.22,41.75 94.72,41.25 94.72,40.82 94.5,40.6 C57.1
  BOTTOM w0.3: v1(62.55,38.12) 62.5,38.07 62.5,36.32 62.46,36.28 v1(62.46,28.37)
VCC-SIM: length 42.6
  TOP w0.2: U5.21 74.46,20.45 74.41,20.41 R34.1 74.41,19.19 74.4,19.18 v2(74.4,18.55) ; U7.8 92.86,8.51 92.85,8.5 92.1,8.5 90.58,6.98 J17.C1 83.33,6.98 78.91,2.56 C73.1 78.04,1.94 77.6,1.5 76,1.5 74.4,3.1 v2(74.4,15.85)
  BOTTOM w0.2: v2(74.4,15.85) v2(74.4,18.55)
VCC_3V3: length 257.6
  TOP w0.2: v1(9.55,34.85) 8.96,35.44 R52.1
  TOP w0.3: R53.1 9.21,28.79 10.75,27.25 v1(10.75,26.45) ; 33.57,30.34 32.89,29.65 U1.64 ; J7.15 50.25,10.09 46.56,13.78 C15.1 45.98,14.59 45.48,14.59 45.15,14.92 v1(45.15,15.5) ; v1(8.56,23.75) R10.1 ; U4.8 14.8,14.36 14.77,14.34 C51.1 C52.1 ; R8.2 50.21,34.45 C37.1 51.51,34.6 51.66,34.45 C36.1 53.23,34.45 53.26,34.48 C35.1 54.57,34.48 54.84,34.21 U3.5 ; C27.1 61.21,12.79 C13.1 60.3,9.01 59.57,8.28 J7.1 ; R60.1 15.29,28.25 14.75,28.79 14.75,30.78 15.87,31.9 v1(16.45,31.9) ; R2.1 21.04,37.16 21.04,36.23 23.3,33.97 C3.1 23.01,33.26 U1.13 23.01,29.37 22.87,29.23 v1(22.87,28.65) ; v1(34.81,37.99) 34.51,38.29 R1.2 ; R11.1 8.56,15.11 10.35,16.9 14.5,16.9 14.8,16.6 14.8,15.85 ; C5.1 32.25,11.11 32.3,11.17 J1.1 30.61,12.29 30,12.9 R7.2 R61.2 ; 18.07,20.76 18.05,20.78 C4.1 U1.32
  TOP w0.5: v1(53,32.7) 53,33.8 ; J1.1 33.41,13.4 39.38,13.4 41.04,11.74 ; C1.1 33.68,30.35 ; 33.68,30.35 34.07,30.35 36.72,33 v1(37.4,33) 38.08,33 38.1,33.02 47.41,33.02 48.48,34.09 R8.2 ; 33.68,30.35 33.57,30.35 33.57,30.34 33.31,30.6 30.39,30.6 v1(26.8,27.01) ; v1(26.8,27.01) 20.55,20.76 18.07,20.76 18.07,18.37 18.05,18.35 18.05,18.09 17.56,17.6 C53.1 16.8,16.65 16,15.85 14.8,15.85 U4.8 ; v1(26.8,27.01) 26.31,27.5 24.02,27.5 v1(22.87,28.65) ; 41.04,11.74 39.65,10.35 39.65,7.71 40.08,7.28 C18.1 42.58,7.28 C17.1 42.93,5.65 42.98,5.6 C12.1 41.96,4.59 41.9,4.53 C23.1 39.7,4.53 ; 41.04,11.74 C2.1 42.71,11.74 v1(42.95,11.5) ; LS1.1 30.04,5.34 ; C27.1 63.5,12.9 v1(63.5,12.05) ; R17.1 30.5,5.2 ; J26.1 35.65,4.75
  BOTTOM w0.2: v1(9.55,34.85) 10.3,34.85 13.24,31.91
  BOTTOM w0.3: v1(34.81,37.99) 34.81,36.62 37.4,34.03 v1(37.4,33) ; v1(10.75,26.45) 10.75,25.7 9.95,24.9 9.08,24.9 8.56,24.38 v1(8.56,23.75)
  BOTTOM w0.5: 53.01,27.9 53,27.91 53,28 ; 53.01,27.9 49,27.9 46.15,25.05 46.15,16.5 v1(45.15,15.5) 45.15,13.7 v1(42.95,11.5) ; 53.01,27.9 53.01,19.51 J21.6 ; v1(63.5,12.05) 63.5,21.9 57.5,27.9 53.1,27.9 53,28 ; 53,28 53,28 v1(53,32.7) ; v1(22.87,28.65) 21.62,29.9 21.6,29.9 19.6,31.9 v1(16.45,31.9) 16.45,31.91 13.21,31.91 10.75,29.45 v1(10.75,26.45)
VCC_12V: length 19.3
  TOP w0.178: J28.2 72.95,56.41 ; J28.2 72.95,54.05 ; J28.2 74.13,55.23 ; J28.2 73.84,56.12
  TOP w0.5: 20.87,48.64 21.04,48.82 21.04,49.31 21.37,49.64 L4.1 ; 34.95,49.05 34.96,49.06 L5.1 ; L3.1 48.2,49.15 47.69,48.64 46.56,48.64 C39.1 ; L2.1 61.77,49.38
  vias: v1(21.45,48.7) v1(21.5,47.95) v1(21.5,47.1) v1(35.42,47.15) v1(35.47,47.91) v1(35.92,48.82) v1(49.01,49.04) v1(48.97,48.01) v1(49.01,47.15) v1(61.96,47.89) v1(62.01,46.79) v1(62.51,48.66) v1(73.9,48) v1(73.9,47.15) v1(73.95,48.91) v1(74.9,49.05) v1(75,48.05) v1(75,47.1)
ARM_SWCLK: length 2.8
  TOP w0.2: J1.4 31.01,21.2 U1.49
ARM_SWDIO: length 7.5
  TOP w0.2: U1.46 28.01,21.07 28.19,21.25 29.5,21.25 29.7,21.05 29.7,19.98 J1.3
BK_A: length 6.5
  TOP w0.2: J6.1 35.74,11.4
  TOP w0.5: R17.2 35.08,7.77 35.75,8.44 C11.1 35.73,10.35 35.74,10.36 35.74,11.4
BK_K: length 8
  TOP w0.5: v1(64.65,13.9) 64.65,13.28 Q3.3
  BOTTOM w0.5: v1(64.65,13.9) 64.65,12.05 65.29,11.41 67.42,11.41 67.43,11.4 J8.1
BUZZER: length 5.5
  TOP w0.178: U1.33 21.51,17.81 R15.1 R16.2
CLOSER_DEACT: length 25.8
  TOP w0.2: J25.1 11.2,34.26 11.2,29.15 13.3,27.05 17.95,27.05 18.55,27.65 U1.21
CON1: length 86.7
  TOP w0.178: U1.40 v1(25.01,13.2) ; R58.2 v1(80.74,18.22)
  BOTTOM w0.178: v1(80.74,18.22) 81.57,18.22 82.84,16.95 82.84,6.13 82.38,5.67 64.15,5.67 62.45,3.97 39.45,3.97 36.1,7.32 25.85,7.32 25.01,8.17 v1(25.01,13.2)
CON2: length 87.7
  TOP w0.178: v1(24.27,13.2) 24.27,13.79 24.51,14.03 U1.39 ; v1(82.83,18.01) 82.31,18.01 81.94,18.38 R57.2
  BOTTOM w0.178: v1(24.27,13.2) 24.27,8.37 25.7,6.95 35.95,6.95 39.3,3.6 62.6,3.6 64.3,5.3 82.54,5.3 83.22,5.98 83.22,17.62 v1(82.83,18.01)
CON3: length 88.5
  TOP w0.178: R56.2 83.14,18.51 v1(83.6,18.05) ; U1.38 24.01,14.27 23.54,13.79 v1(23.54,13.2)
  BOTTOM w0.178: v1(23.54,13.2) 23.54,8.57 25.54,6.57 35.79,6.57 39.14,3.22 62.76,3.22 64.46,4.92 82.7,4.92 83.6,5.82 v1(83.6,18.05)
CON4: length 90.1
  TOP w0.178: R55.2 v1(84.34,18.04) ; v1(22.8,13.2) 22.8,13.79 23.59,14.59 23.59,19.15 23.51,19.23 U1.37
  BOTTOM w0.178: v1(84.34,18.04) 84.34,17.34 83.98,16.98 83.98,5.66 82.85,4.54 64.62,4.54 62.92,2.84 38.98,2.84 35.63,6.19 25.38,6.19 22.8,8.77 v1(22.8,13.2)
CPU_STATUS: length 4
  TOP w0.178: D1.2 27.29,16.85 27.51,17.07 U1.45
HOST_RXD: length 9.1
  TOP w0.2: U5.25 79.26,15.67 J15.2
HOST_TXD: length 6.7
  TOP w0.2: U5.26 80.46,22.13 79.73,21.41 79.73,17.74 J15.1
KEY1: length 18.2
  TOP w0.178: 41.71,24.46 40.9,23.65 U1.52
  TOP w0.2: SW4.1 SW4.2
KEY2: length 27.3
  TOP w0.178: U1.53 38.05,24.15 40.42,26.52 48.3,26.52 49.27,25.56 SW5.2
  TOP w0.2: SW5.2 SW5.1
KEY3: length 35.1
  TOP w0.178: SW6.2 56.88,25.56 55.53,26.9 40.2,26.9 37.95,24.65 U1.54
  TOP w0.2: SW6.2 SW6.1
LCD_A0: length 48.9
  TOP w0.178: J7.18 48.75,7.17 49.15,6.77 v1(49.15,6.2)
  TOP w0.2: v2(22.41,18.45) 22.41,18.99 22.51,19.09 U1.35 ; J7.18 48.75,9.35 44.65,13.45 43.55,13.45 v1(41.9,15.1)
  BOTTOM w0.178: J21.3 50,17.13 49.15,16.28 v1(49.15,6.2)
  BOTTOM w0.2: v1(41.9,15.1) 36.55,15.1 33.05,18.6 23.11,18.6 22.96,18.45 v2(22.41,18.45)
LCD_BKLIGHT: length 43.8
  TOP w0.178: 39.66,28.81 39,28.15
  TOP w0.2: R18.1 64.37,17.48 64.37,17.49 R19.2 62.55,19.92 62.55,26.84 60.58,28.81 39.66,28.81 ; 39,28.15 37.17,28.15 U1.61
LCD_NCS: length 39.8
  TOP w0.178: v1(47.65,6.2) 47.65,6.72 47.75,6.82 J7.20
  TOP w0.2: U1.50 34.15,22.65 38.3,18.5 38.3,16.35 42,12.65 43.88,12.65 47.75,8.78 J7.20
  BOTTOM w0.178: J21.1 48,7.07 47.65,6.72 v1(47.65,6.2)
LCD_NRST: length 47.7
  TOP w0.178: v1(48.4,6.2) 48.4,6.77 48.25,6.92 J7.19
  TOP w0.2: v2(23.01,17.8) U1.36 ; v1(41.2,14.52) 42.67,13.05 44.36,13.05 48.25,9.16 J7.19
  BOTTOM w0.178: J21.2 49,17.15 48.4,16.55 v1(48.4,6.2)
  BOTTOM w0.2: v2(23.01,17.8) 29.75,17.8 31.45,16.1 34.75,16.1 36.35,14.5 40.65,14.5 40.67,14.52 v1(41.2,14.52)
LCD_SCK: length 43.1
  TOP w0.178: v1(49.9,6.2) 49.9,6.77 49.25,7.42 J7.17
  TOP w0.2: v2(43.1,15.05) 44.25,13.9 44.88,13.9 49.25,9.53 J7.17 ; U1.55 32.05,25.15 v2(32.2,25.3)
  BOTTOM w0.178: v1(49.9,6.2) 49.9,16.18 51,17.28 J21.4
  BOTTOM w0.2: v2(43.1,15.05) 43.1,16.55 34.35,25.3 v2(32.2,25.3)
LCD_SDI: length 46.1
  TOP w0.178: v1(50.35,5.3) 50.35,5.82 50.47,5.94 50.47,6.73 49.75,7.46 J7.16
  TOP w0.2: U1.57 31.94,26.15 v2(32.16,26.15) ; v2(44.05,15.05) 44.75,14.35 45.01,14.35 49.75,9.61 J7.16
  BOTTOM w0.178: v1(50.35,5.3) 50.72,5.67 50.72,16 52,17.28 J21.5
  BOTTOM w0.2: v2(44.05,15.05) 44.05,16.7 34.6,26.15 v2(32.16,26.15)
LED_LINE: length 49.7
  TOP w0.2: v2(27.68,29.05) 27.09,29.05 25.51,30.63 U1.8
  TOP w0.3: R20.1 R21.2 65.71,40.7 65.68,40.7 65.28,40.3 54.81,40.3 52.85,38.34 38.34,38.34 v2(32.1,32.1)
  BOTTOM w0.3: v2(32.1,32.1) 29.05,29.05 v2(27.68,29.05)
M2M_NLED: length 5.8
  TOP w0.17: U5.13 68.28,32.63 67.7,32.05 67.7,30.25 R49.2
M2M_NRST: length 35.7
  TOP w0.178: Q9.3 65.8,34 66.2,34.4 v1(66.69,34.4)
  TOP w0.2: U5.34 v1(89.04,29.03)
  BOTTOM w0.2: v1(66.69,34.4) 66.85,34.4 70.7,38.25 87.4,38.25 89.85,35.8 89.85,29.5 89.38,29.03 v1(89.04,29.03)
M2M_PWRKEY: length 32.9
  TOP w0.2: R48.2 57.38,30.2 38.1,30.2 36.55,28.65 U1.62
M2M_RXD: length 16.4
  TOP w0.2: R36.1 65.05,30.5 72.62,38.07 74.72,38.07 75.66,37.13 U5.9
M2M_TXD: length 17.5
  TOP w0.2: U5.8 76.86,37.13 75.5,38.49 72.39,38.49 65.65,31.75 R35.1
MOTOR_CTRL1: length 37.7
  TOP w0.2: v2(26.13,28.94) 25.01,30.06 U1.9
  TOP w0.3: v2(31.05,32) 38.19,39.14 51.7,39.14 R24.2 R22.1
  BOTTOM w0.3: v2(26.13,28.94) 26.96,29.77 28.82,29.77 v2(31.05,32)
MOTOR_CTRL2: length 25.6
  TOP w0.2: U1.10 24.52,31.65 v2(24.52,29.08)
  TOP w0.3: R23.1 R25.2 39.81,40.55 38.69,40.55 v2(30.14,32)
  BOTTOM w0.3: v2(30.14,32) 28.43,30.29 25.73,30.29 v2(24.52,29.08)
MOTOR_CTRL3: length 17.4
  TOP w0.2: U1.14 22.51,33.6 20.26,35.85
  TOP w0.3: R28.1 R29.2 26.04,40.1 21.62,40.1 20.26,38.74 20.26,35.85
MOTOR_CTRL4: length 14.8
  TOP w0.3: R26.1 R27.2 22.01,33.08 U1.15
PA9(M2M_RX): length 42.7
  TOP w0.178: v1(38.65,28.75) 39.1,29.2 59.98,29.2 61.28,30.5 R36.2 ; v1(29.15,24.54) 27.83,24.54 26.01,22.72 U1.42
  BOTTOM w0.178: v1(38.65,28.75) 37.3,27.4 30.5,27.4 29.15,26.05 v1(29.15,24.54)
PA10(M2M_TX): length 43
  TOP w0.178: R35.2 59.9,29.65 38.72,29.65 v1(37.8,28.73) ; v1(28.4,23.8) 27.8,23.8 26.51,22.51 U1.43
  BOTTOM w0.178: v1(28.4,23.8) 28.4,26.03 30.27,27.9 36.97,27.9 v1(37.8,28.73)
RS485_DIR: length 15.2
  TOP w0.178: U4.2 13.53,22.77 v1(13,23.3) ; v1(13.57,28.15) 14.09,28.15 14.64,27.6 17.74,27.6 18.29,28.15 U1.20
  TOP w0.2: U4.3 U4.2
  BOTTOM w0.178: v1(13,23.3) 13.57,23.87 v1(13.57,28.15)
RS485_RX: length 26.4
  TOP w0.178: v1(14.15,23.35) 14.8,22.7 U4.1 ; U1.17 20.25,29.65 20.45,29.85 20.45,33.12 18.17,35.4 R43.1 14.75,31.92 13.8,30.97 v1(13.8,29.3)
  BOTTOM w0.178: v1(14.15,23.35) 14.52,23.72 14.52,28.58 v1(13.8,29.3)
RS485_TX: length 26.8
  TOP w0.178: U1.16 21.51,32.64 17.48,36.67 R42.1 14.37,36.67 14.1,36.4 14.1,32 12.75,30.65 v1(12.75,29) ; 10.99,22.03 10.99,22.59 v1(11.75,23.35)
  TOP w0.2: 10.99,22.03 U4.4
  BOTTOM w0.178: v1(11.75,23.35) 12.75,24.35 v1(12.75,29)
SPK_N: length 29.4
  TOP w0.3: J24.1 72.39,5.09 D24.1 72.17,6.88 C85.2 C84.2 72.4,9.82 72.4,13.75 71.56,14.59 C80.1 C81.1 69.92,16.18 69.3,16.8 69.3,27.53 69.6,27.83 U5.17
SPK_P: length 29.9
  TOP w0.3: J24.2 66.13,4.79 D23.2 66.12,6.67 C82.1 C83.1 66.45,10.07 66.45,13 68.04,14.59 C80.2 C81.2 68.62,28.4 69.25,29.03 U5.16
SWITCH1: length 22.4
  TOP w0.17: R52.2 3.79,35.44 J22.1
  TOP w0.2: R52.2 C78.2 7.12,32.9 7.21,32.82 D21.2 7.21,31.76 12.32,26.65 U1.23
SWITCH2: length 21
  TOP w0.2: U1.24 13.3,26.15 12.7,25.55 10.05,25.55 9.25,24.75 7.47,24.75 7.21,25.01 D22.2 7.21,26.07 7.12,26.15 C79.2 R53.2 6.51,28.79 5.97,28.25 J23.1
SWITCH3: length 22.4
  TOP w0.17: C76.2 3.33,20.26 J4.1
  TOP w0.2: D15.2 7.31,19.6 7.26,19.65 C76.2 R10.2 7.26,23.76 7.85,24.35 9.42,24.35 10.22,25.15 12.87,25.15 13.36,25.65 16.99,25.65 16.99,25.65 U1.25
SWITCH4: length 29.7
  TOP w0.17: C77.2 3.22,12.54 J5.1
  TOP w0.2: U1.26 13.43,25.15 13.03,24.75 10.6,24.75 9.8,23.95 9.8,17.39 7.26,14.85 R11.2 C77.2 7.26,9.76 7.36,9.66
UIM_CLK: length 9.4
  TOP w0.2: R44.1 C71.1 76.86,15.09 U5.23
UIM_DAT: length 16.2
  TOP w0.2: R34.2 75.71,9.27 76.14,8.85 C70.1 R45.1
  TOP w0.3: R34.2 75.71,20.46 75.66,20.51 U5.22
UIM_RST: length 18.7
  TOP w0.2: C72.1 R37.1 79.39,5.74 80.52,6.87 80.54,6.87 83.19,9.52 J17.C2 92.52,9.52 92.8,9.8 93.47,9.8 U7.7
N1759652: length 1.7
  TOP w0.17: C63.1 100.9,44.4 U6.1
N1759680: length 3.2
  TOP w0.17: C63.2 101.4,42.6 L6.1
N1759848: length 4.6
  TOP w0.17: 100.5,47.7 101.35,47.7 R39.1 C68.1 ; 100.5,47.7 100.5,46.77 U6.3 ; 100.5,47.7 R41.1
N2040598: length 16.4
  TOP w0.2: U7.6 92.15,11.05 91.14,12.06 J17.C3 85.53,12.06 84.64,12.95 79.7,12.95 79.29,13.36 R44.2
N2040809: length 30.9
  TOP w0.2: U7.2 U7.3 100.55,11.05 100.9,11.4 v1(100.9,12.85) ; R45.2 80.37,7.27 83.89,10.79 J17.C7 v1(88.59,10.79)
  BOTTOM w0.2: v1(100.9,12.85) 100.25,13.5 89.65,13.5 88.59,12.44 v1(88.59,10.79)
N16946466: length 7.8
  TOP w0.2: C6.1 26.01,34.64 U1.7
  TOP w0.3: R2.2 C6.1
N16946476: length 8.7
  TOP w0.3: 26.51,37.18 26.42,37.18 C10.2 ; 26.51,37.18 U1.6 ; 26.51,37.18 26.61,37.18 27.59,38.15 U2.3
N16946478: length 8.1
  TOP w0.3: U1.5 27.01,32.63 29.29,34.91 U2.1 29.29,36.15 30.12,36.99 C9.2
N16953286: length 6.7
  TOP w0.3: Q2.3 19.77,7.59 LS1.2
N16955118: length 7.1
  TOP w0.3: R1.1 29.01,32.78 U1.1
N17004384: length 2.5
  TOP w0.3: C34.1 55.12,36.69 55.7,36.11 U3.4
N17045369: length 1.8
  TOP w0.3: Q3.1 66.05,16.1 R18.2
N17083363: length 2.3
  TOP w0.178: Q2.1 20.72,13.93 20.15,14.5 R15.2
N17090159: length 4.4
  TOP w0.5: U5.32 89.57,26.33 89.57,26.34 R30.1 90.35,26.37 C49.1
N17090163: length 9.9
  TOP w0.5: E1.1 94.51,24.9 arc(93.85,25.03) 93.3,25.4 92.88,25.82 arc(92.31,26.2) R30.2 91.63,27.62 arc(91.69,27.92) C50.1
N17091772: length 18.4
  TOP w0.2: U5.20 73.26,18.24 75.1,16.4 75.1,7.38 R37.2
N17104658: length 10.5
  TOP w0.2: U4.7 13.53,11.68 D9.2 16.17,7.64 16.24,7.64 J14.1
N17104686: length 10.6
  TOP w0.2: U4.6 12.26,14.96 11.45,14.15 11.13,14.15 10.93,13.95 D9.1 11.55,10.36 11.55,9.8 J14.2
N17118623: length 14.3
  TOP w0.5: C40.1 54.67,48.61 55.68,49.61 D5.1 ; D5.1 57.52,50.82 58.66,51.96 L2.2 ; D5.1 55.68,56.72 J10.2
N17118627: length 12.7
  TOP w0.5: Q5.3 51.94,46.37 52.58,47.01 C40.2 52.58,49.07 52,49.65 52,50.69 D5.2 51.88,55.46 J10.1
N17128567: length 2.7
  TOP w0.3: R22.2 52.58,44.09 53.07,44.58 Q5.1
N17129471: length 13.2
  TOP w0.5: J11.1 38.72,54.48 D6.2 38.55,50.85 38.55,49.5 C41.2 39.51,46.94 38.98,46.41 Q6.3
N17129483: length 14.2
  TOP w0.5: L3.2 45.23,52 44.25,51.02 D6.1 ; C41.1 41.56,48.55 42.52,49.5 D6.1 ; D6.1 42.52,55.74 J11.2
N17129487: length 2.9
  TOP w0.3: R23.2 39.51,44.34 39.79,44.62 Q6.1
N17129769: length 19.8
  TOP w0.5: Q7.3 10.14,45.73 9.88,45.98 C44.2 9.24,48.79 9.24,55.03 10.31,56.09 D7.2 15.98,56.09 J12.1
N17129781: length 17.5
  TOP w0.5: C44.1 11.18,48.9 11.51,49.22 D7.1 17.64,52.3 18.04,51.9 L4.2 19.33,56.91 J12.2
N17129785: length 2.2
  TOP w0.3: Q7.1 12.53,43.54 R26.2
N17130076: length 20.2
  TOP w0.5: Q8.3 29.9,43.23 28.08,45.05 26.74,45.05 26.26,45.54 C45.2 24.1,48.45 24.1,49.45 25.02,50.36 D8.2 25.02,54.67 27.25,56.9 28.96,56.9 J13.1
N17130088: length 15.6
  TOP w0.5: J13.2 32.92,55.75 L5.2 30.62,52.03 30.61,52.04 30.14,51.57 D8.1 28.82,47.55 C45.1
N17130092: length 6.5
  TOP w0.3: R28.2 25.71,43.41 26.25,43.95 27.95,43.95 28.94,42.96 Q8.1
N17130929: length 11.7
  TOP w0.5: J9.1 65.53,56.54 D3.2 65.53,50.01 65.45,49.93 C32.2 65.45,46.96 65.04,46.55 Q4.3
N17130933: length 13.5
  TOP w0.5: C32.1 68.73,48.71 69.7,49.68 69.7,50.85 69.38,51.17 ; 69.38,51.17 D3.1 69.33,55.28 J9.2 ; 69.38,51.17 L1.2
N17130937: length 2.9
  TOP w0.3: R20.2 65.45,44.31 65.9,44.76 Q4.1
N17139677: length 6.7
  TOP w0.17: R51.1 92.2,46.35 R40.1
  TOP w0.178: U6.4 97.22,46.15 92.3,46.15 R51.1
N17146852: length 7.2
  TOP w0.2: C14.2 48.06,13.64 48.41,13.64 51.25,10.8
  TOP w0.3: J7.13 51.25,10.8
N17147425: length 25.8
  TOP w0.178: v1(52,5.1) 51.55,5.55 51.55,6.92 51.75,7.12 J7.12
  TOP w0.3: J7.12 51.75,11.79 C16.2
  BOTTOM w0.178: v1(52,5.1) 51.4,5.7 51.4,14.5 54,17.1 J21.7
N17147428: length 24.8
  TOP w0.178: J7.11 52.25,6.87 52.15,6.77 v1(52.15,6.2)
  TOP w0.3: C16.1 50.13,14.71 50.3,14.71 C19.1 51.02,13.71 51.12,13.47 51.17,13.2 51.17,13.18 52.25,12.1 J7.11
  BOTTOM w0.178: v1(52.15,6.2) 52.15,14.43 55,17.28 J21.8
N17147560: length 7.7
  TOP w0.3: J7.10 52.75,12.43 51.84,13.34 51.84,14.47 C19.2
N17147576: length 6
  TOP w0.3: C20.2 53.75,13.36 J7.8
N17147579: length 7.8
  TOP w0.3: C20.1 52.89,15.29 52.41,14.8 52.41,13.47 53.25,12.63 J7.9
N17147653: length 22.5
  TOP w0.178: v1(53.65,6.2) 54.25,6.8 J7.7
  TOP w0.3: J7.7 54.25,12.84 54.73,13.33 C21.2
  BOTTOM w0.178: v1(53.65,6.2) 53.65,14.75 56,17.1 J21.9
N17147656: length 6.3
  TOP w0.3: C22.2 54.75,12.51 J7.6
N17147659: length 6.7
  TOP w0.3: C24.2 55.25,11.51 J7.5
N17147662: length 7.2
  TOP w0.3: C25.2 55.75,10.41 J7.4
N17147665: length 7.6
  TOP w0.3: J7.3 56.25,9.39 C26.2
N17170357: length 5.8
  TOP w0.178: R47.1 64.1,34.97 65.89,34.97 Q9.1
  TOP w0.2: R48.1 62.17,35.68 62.17,35.68 R47.1
N17173564: length 2.7
  TOP w0.17: Q10.1 67.37,28.38 R49.1 67.24,28.51 R50.1
N17174278: length 2.3
  TOP w0.3: R33.1 65.32,22.6 65.68,22.6 66.28,22 D10.1
N17197797: length 20.1
  TOP w0.17: R54.2 68.13,37.61
  TOP w0.2: 68.13,37.61 68.66,37.61 69.94,38.89 76.21,38.89 76.75,38.35 84.67,38.35 85.26,37.76 U5.1
N17203118: length 2.7
  TOP w0.178: U5.30 85.26,21.25 R55.1
N17203121: length 2.7
  TOP w0.178: U5.29 84.06,21.25 R56.1
N17203124: length 2.7
  TOP w0.178: U5.28 82.86,21.25 R57.1
N17203355: length 2.7
  TOP w0.178: R58.1 81.66,21.25 U5.27
N17205657: length 14.2
  TOP w0.2: R43.2 12.67,35.4 J25.2
N17205689: length 15
  TOP w0.2: J25.3 12.91,37.7 12.91,37.21 R42.2
N17208386: length 2.4
  TOP w0.25: R59.2 17.88,29.45 18.18,29.15 U1.18
N17208667: length 2.4
  TOP w0.25: U1.19 17.65,28.65 R60.2
N17209260: length 2.5
  TOP w0.25: R61.1 30,19.05 29.78,19.27 29.32,19.27 29.01,19.58 U1.48
N17209595: length 2
  TOP w0.25: U1.47 28.51,18.59 R62.1
N169967930: length 2.2
  TOP w0.3: R8.1 47.25,34.53 D2.1
N169968320: length 1.5
  TOP w0.3: D1.1 28.4,14.7 R7.1
N170492131: length 1.5
  TOP w0.178: Q10.3 66.42,23.62 D10.2

## Copper pours and planes (outline as drawn; the poured copper is in the pictures)
GND on TOP: 5,0.16 1.58,1.58 0.16,5 0.16,55 1.58,58.42 5,59.84 98.5,59.84 101.92,58.42 103.34,55 103.34,5 101.92,1.58 98.5,0.16 ; 24 cut-outs
GND on BOTTOM: 103.34,5 101.92,1.58 98.5,0.16 5,0.16 1.58,1.58 0.16,5 0.16,55 1.58,58.42 5,59.84 98.5,59.84 101.92,58.42 103.34,55 ; 5 cut-outs
VCC-M2M on TOP: 86.3,34.55 86.3,32.4 86.45,32.25 89.2,32.25 89.5,31.95 89.5,30.3 89.55,30.25 91.05,30.25 91.25,30.45 91.25,34.95 91.75,35.45 96.35,35.45 97.65,34.15 101.25,34.15 103,35.9 103,39.35 102.6,39.75 96.15,39.75 95.55,40.35 95.55,40.9 95.35,41.1 94.3,41.1 94.15,40.95 94.15,37.15 93.95,36.95 89.45,36.95 89,36.5 89,34.85 88.85,34.7 86.45,34.7
VCC_3V3 on TOP (solid shape): 43.8,7.45 43.8,4.1 43.55,3.85 39.57,3.85 39.52,3.8 36.95,3.8 36.95,4 36.85,4.1 34.2,4.1 33.9,4.4 32.55,4.4 32,3.85 32,3.81 29.32,3.81 28.97,4.16 26.52,4.16 26.4,4.28 26.4,5.69 26.69,5.98 35.52,5.98 35.8,5.7 39.7,5.7 40.3,6.3 40.3,7.75 43.5,7.75
VCC_3V3 on TOP: 48.25,34.87 49.08,34.87 49.47,35.26 50.99,35.26 51.36,34.89 54.32,34.89 54.6,34.61 56.36,34.61 56.6,34.37 56.6,33.89 56.31,33.6 48.77,33.6 48.75,33.58 48.2,33.58 48.01,33.77 48.01,34.6 48.1,34.69 48.1,34.7 48.25,34.85
VCC_12V on TOP (solid shape): 75.81,49.42 75.81,46.56 75.67,46.42 71.72,46.42 71.68,46.46 71.68,49.5 71.78,49.6 75.63,49.6
VCC_12V on TOP: 34.1,52.75 34.5,53.15 36.15,53.15 36.51,52.79 36.51,46.46 36.35,46.3 34.25,46.3 34.1,46.45
VCC_12V on TOP: 45.9,46.29 45.68,46.51 45.68,49.38 45.77,49.47 47.5,49.47 47.5,52.75 47.9,53.15 49.55,53.15 49.91,52.79 49.91,49.34 49.92,49.33 49.92,46.46 49.75,46.29
VCC_12V on TOP: 86.65,59.55 86.65,54.2 87.05,53.8 89.85,53.8 90.1,53.55 90.1,52.25 89.95,52.1 79.15,52.1 76.05,49 76.05,46.5 76,46.45 72.55,46.45 72.25,46.75 72.25,56.25 73,57 74.8,57 75.35,57.55 75.35,59 76,59.65 86.55,59.65
VCC_12V on TOP: 58.88,46.28 58.76,46.4 58.76,49.42 58.86,49.52 60.6,49.52 60.6,52.75 61,53.15 62.65,53.15 63.01,52.79 63.01,46.46 62.85,46.3 62.83,46.3 62.81,46.28
VCC_12V on TOP: 20.35,52.75 20.75,53.15 22.4,53.15 22.76,52.79 22.76,46.46 22.6,46.3 20.5,46.3 20.35,46.45
VCC_12V on BOTTOM: 24.62,49.48 26.2,47.9 27.45,47.9 27.85,48.3 27.88,48.3 29.1,49.52 75.68,49.52 76.5,48.7 76.5,46.75 76.05,46.3 21.15,46.3 20.95,46.5 20.95,48.88 21.55,49.48
N1759680 on TOP: 96.85,44.7 98.4,44.7 98.45,44.65 98.45,44.4 99.2,43.65 100.65,43.65 100.8,43.5 100.8,41.65 100.7,41.55 96.1,41.55 95.9,41.75 95.9,43.5 96.15,43.75 96.5,43.75 96.8,44.05 96.8,44.65
N1765454 on TOP: 89.9,51.45 89.9,46.55 90.7,45.75 97.9,45.75 97.95,45.7 97.95,45.1 97.85,45 96.85,45 95.95,44.1 89.05,44.1 87.3,45.85 87.3,47.1 86.85,47.55 84.6,47.55 84.25,47.9 84.25,49.7 84.5,49.95 87.65,49.95 87.75,50.05 87.75,51.35 88,51.6 89.75,51.6
